# EAGLE board DC Converter Mockup (EAGLE 9.2.2)

Size 45 x 37 mm. Coordinates in mm from the lower left corner, seen from the top.
Outline: 0,35 arc-90 2,37 43,37 arc-90 45,35 45,2 arc-90 43,0 2,0 arc-90 0,2 0,35
Copper layers (1*16): Top 0.035mm / dielectric 1.5mm / Bottom 0.035mm
Design rules "default": minimum track width 6mil, minimum drill 0.35mm, track to track 6mil, track to pad 6mil, pad to pad 6mil, via to via 6mil, smd to smd 6mil, copper to edge 40mil, drill to drill 6mil, minimum pad ring 10mil, minimum via ring 8mil, stop-mask expansion 4mil, vias tented up to drill 0mil, thermal gap 10mil
Holes 2.2 mm at 2,23 43,23

## Footprints (pad centres in the part's own frame; a part is rotated, then mirrored left to right if it is on the bottom)
C1812 = smd 1.9 x 3.4: 1 -1.95,0; 2 1.95,0
PANASONIC_F = smd 4 x 1.6: + 3.55,0; - -3.55,0
PANASONIC_G = smd 3.9 x 1.6: + 4.25,0; - -4.25,0
C0603 = smd 1.1 x 1: 1 -0.85,0; 2 0.85,0
SMC = smd 2.8 x 3.8: A 3.7,0; C -3.7,0
SMA = smd 2 x 2: A 2,0; C -2,0
SO08 = smd 0.6 x 2.2: 1 -1.905,-2.6; 2 -0.635,-2.6; 3 0.635,-2.6; 4 1.905,-2.6; 5 1.905,2.6; 6 0.635,2.6; 7 -0.635,2.6; 8 -1.905,2.6
1X03 = drill 1.016 long: 1 -2.54,0; 2 0,0; 3 2.54,0
INDUCTOR-12X12 = smd 2.8 x 5.4: 1 -4.9,0; 2 4.9,0
1X02 = drill 1.016 long: 1 -1.27,0; 2 1.27,0
TO252 = smd 1 x 1.6: 1 -2.28,-4.8; 2 2.28,-4.8 | smd 5.4 x 6.2: 3 0,2.5
SOT23-EBC = smd 1 x 1.4: B 0.95,-1.1; C 0,1.1; E -0.95,-1.1
R0603 = smd 1 x 1.1: 1 -0.85,0; 2 0.85,0
R1210 = smd 1.6 x 2.7: 1 -1.4,0; 2 1.4,0

## Placement (x,y rotation side)
C1  [C1812]  19,19 90 top
C2  [PANASONIC_F]  9.95,21.83 0 top
C3  [PANASONIC_G]  35.95,17.78 0 top
C4  [C0603]  19,27 0 top
C5  [C0603]  24,30 0 top
C6  [C0603]  24,27 0 top
D1  [SMC]  37.95,6.67 270 top
D2  [SMA]  19.06,12.29 90 top
IC1  LM567D  [SO08]  25,21 180 top
IN  [1X03]  10,30.21 90 bottom
L1  B1280  [INDUCTOR-12X12]  9,9 270 top
OUT  [1X02]  34.5,30.93 90 bottom
Q1  [TO252]  25.22,5.35 270 top
Q2  [SOT23-EBC]  19,34 90 top
R1  [R0603]  19,24 0 top
R2  [R0603]  24,33 0 top
R3  [R0603]  23,12 90 top
R4  [R0603]  29,27 0 top
R5  [R0603]  19.08,30.14 0 top
R6  [R0603]  29,12 90 top
R9  [R1210]  26,12 90 top

## Library data of the parts
C1-C6 = rcl; SPICEPREFIX: C
D1 D2 = diode
IC1 = linear
IN OUT = pinhead
L1 = NixieClock
Q1 = transistor-fet
Q2 = transistor
R1-R6 R9 = rcl; SPICEPREFIX: R

## Nets
GND: IC1.7
V+: IC1.4